# Altium PCB CM5IO.PcbDoc (part 1 of 4)
Units mm, origin at the board's own origin, x right, y up, seen from the top; angles counter-clockwise.
Board outline 160 x 90 mm, 4 copper layers (F.Cu, In1.Cu, In2.Cu, B.Cu); 76 components, 212 nets, 672 pads, 703 vias.
Unrouted connection lines stored in the file: 4.
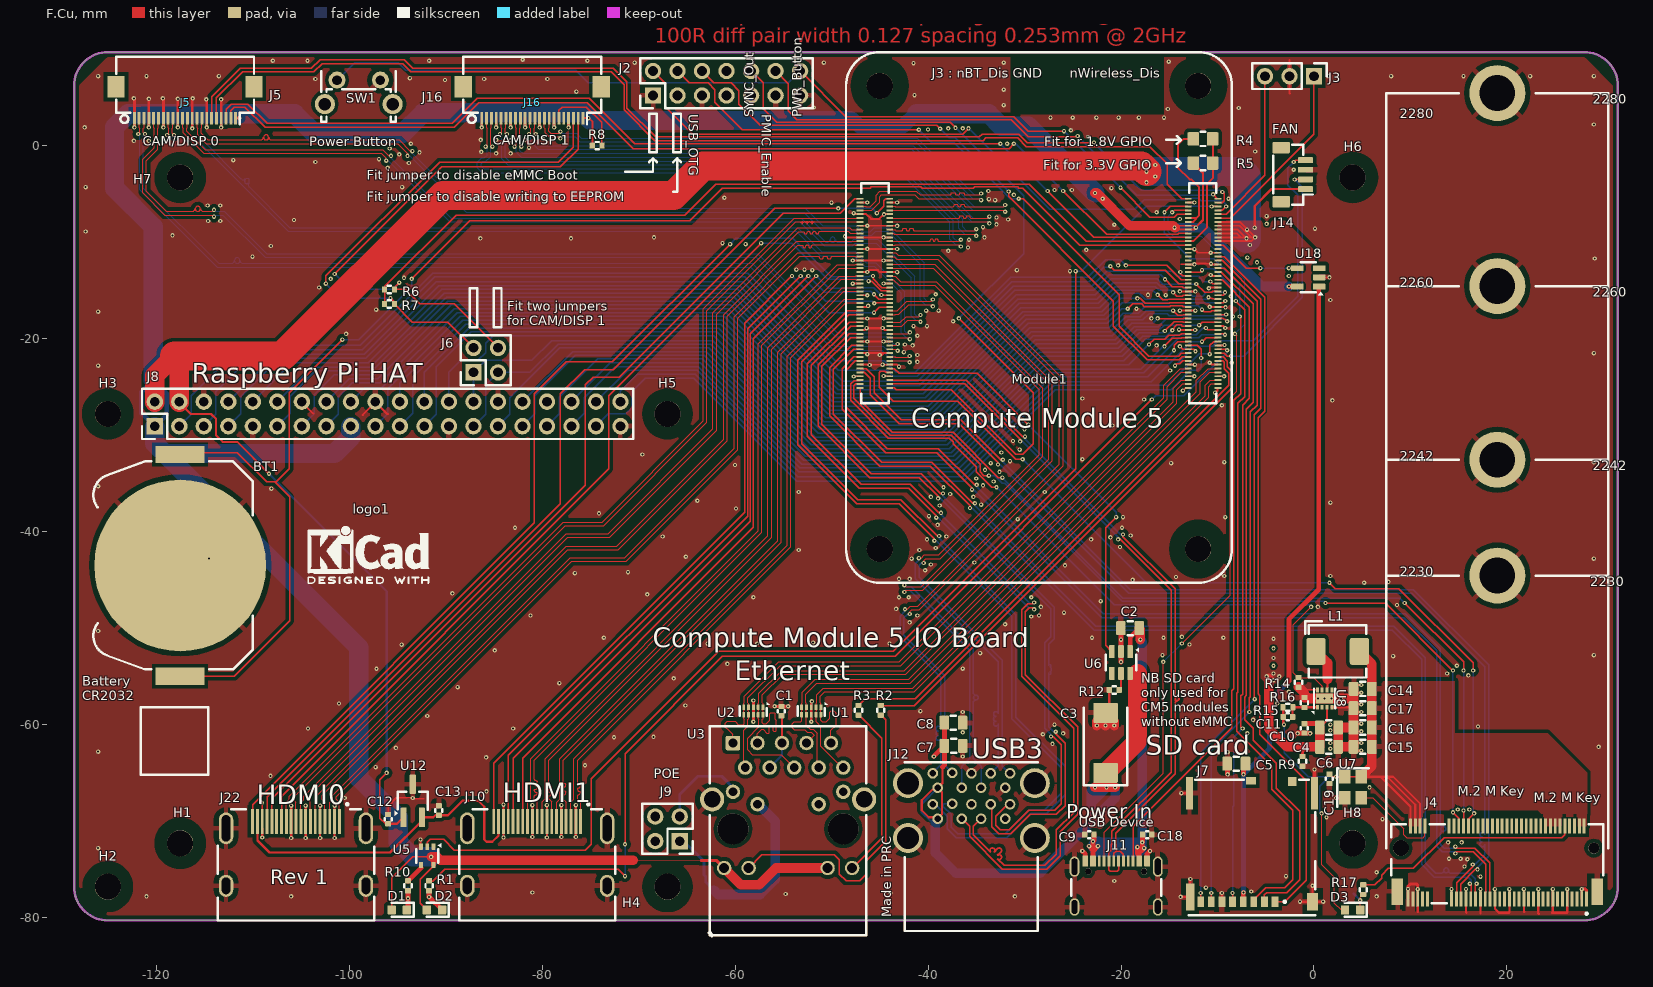
[diagram p0: F.Cu view]
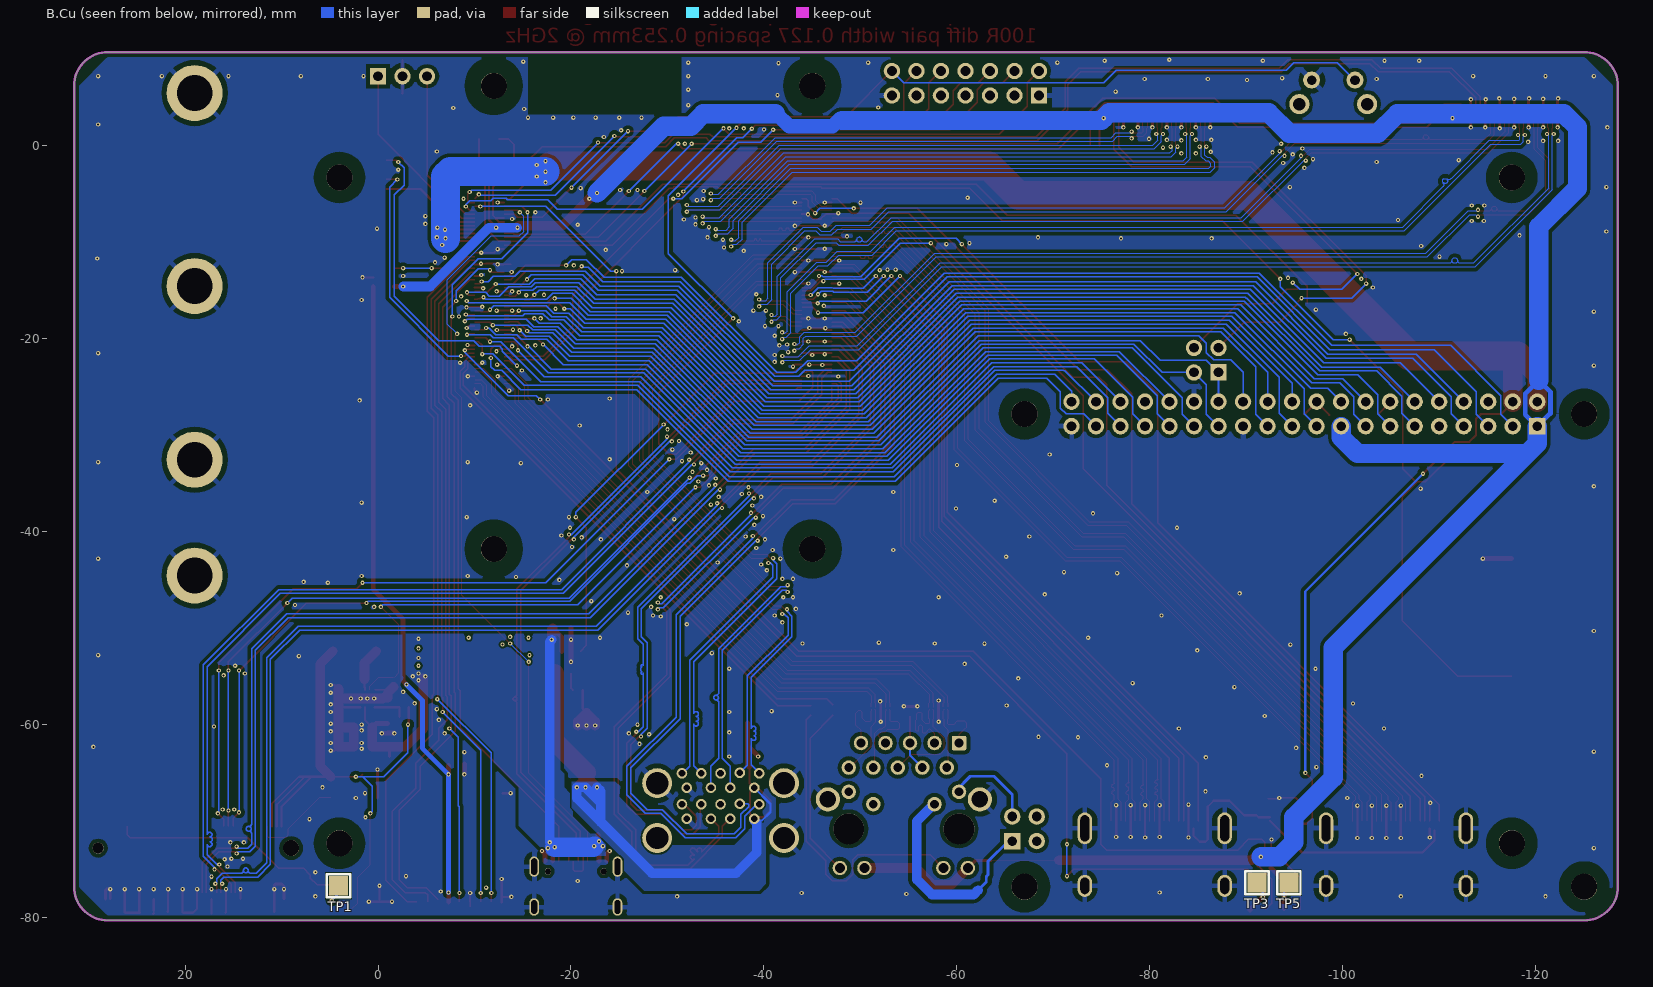
[diagram p1: B.Cu view, seen from below]
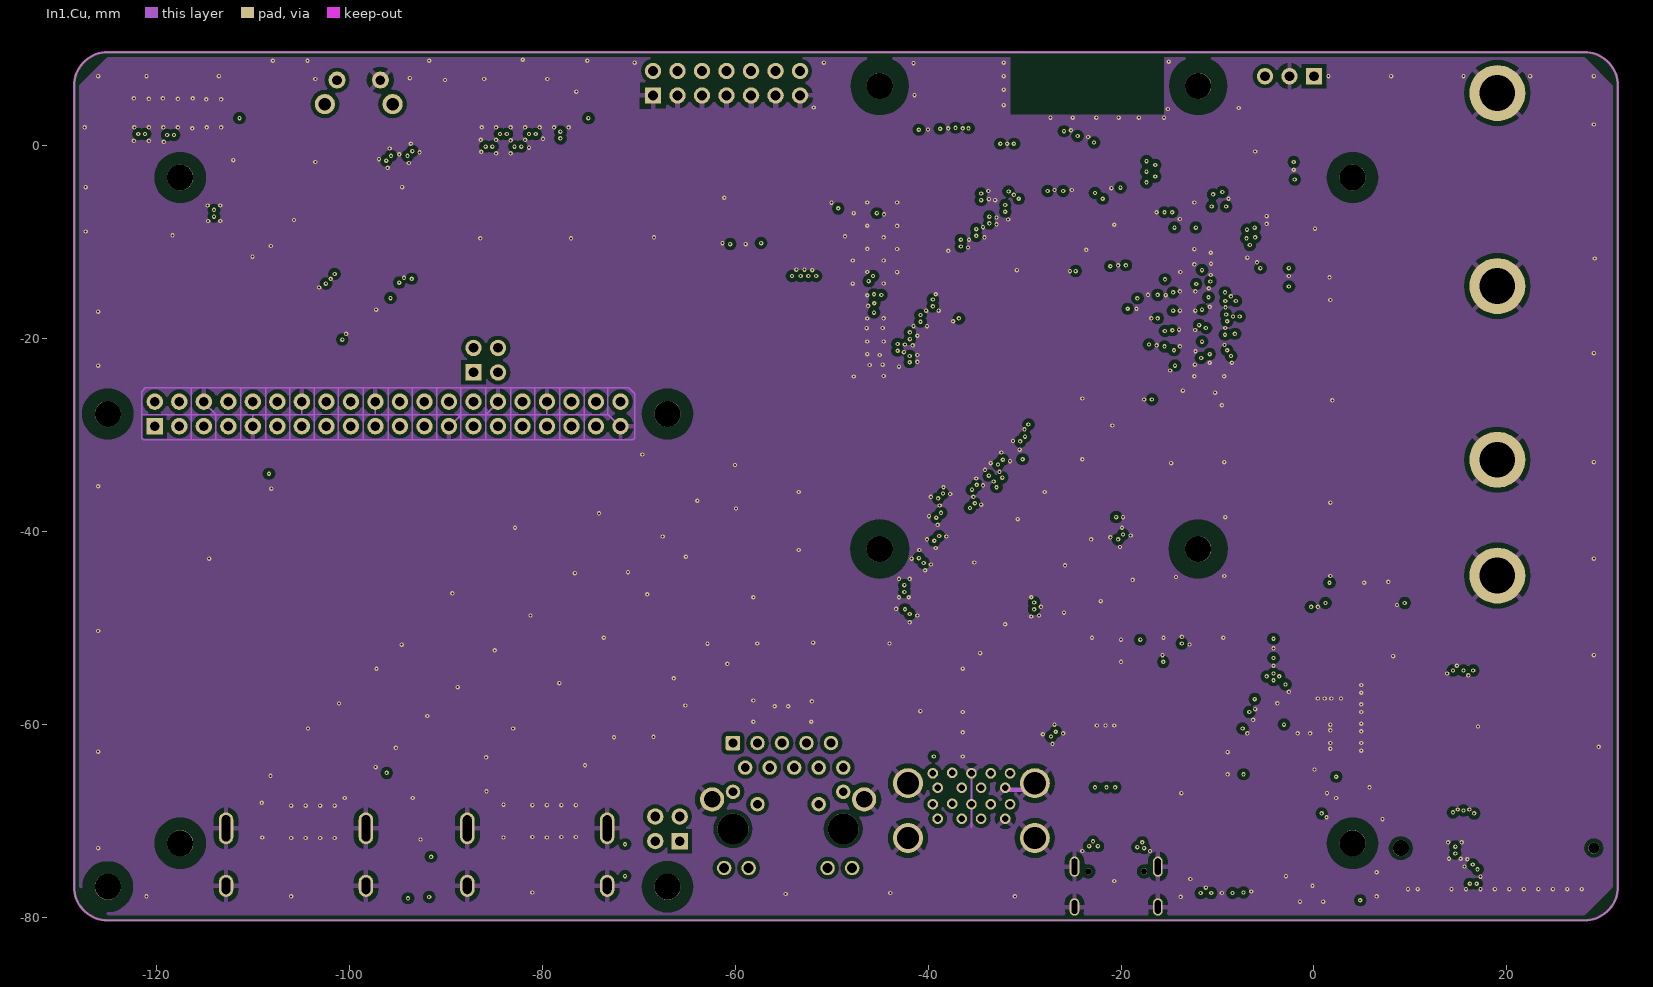
[diagram p2: In1.Cu]
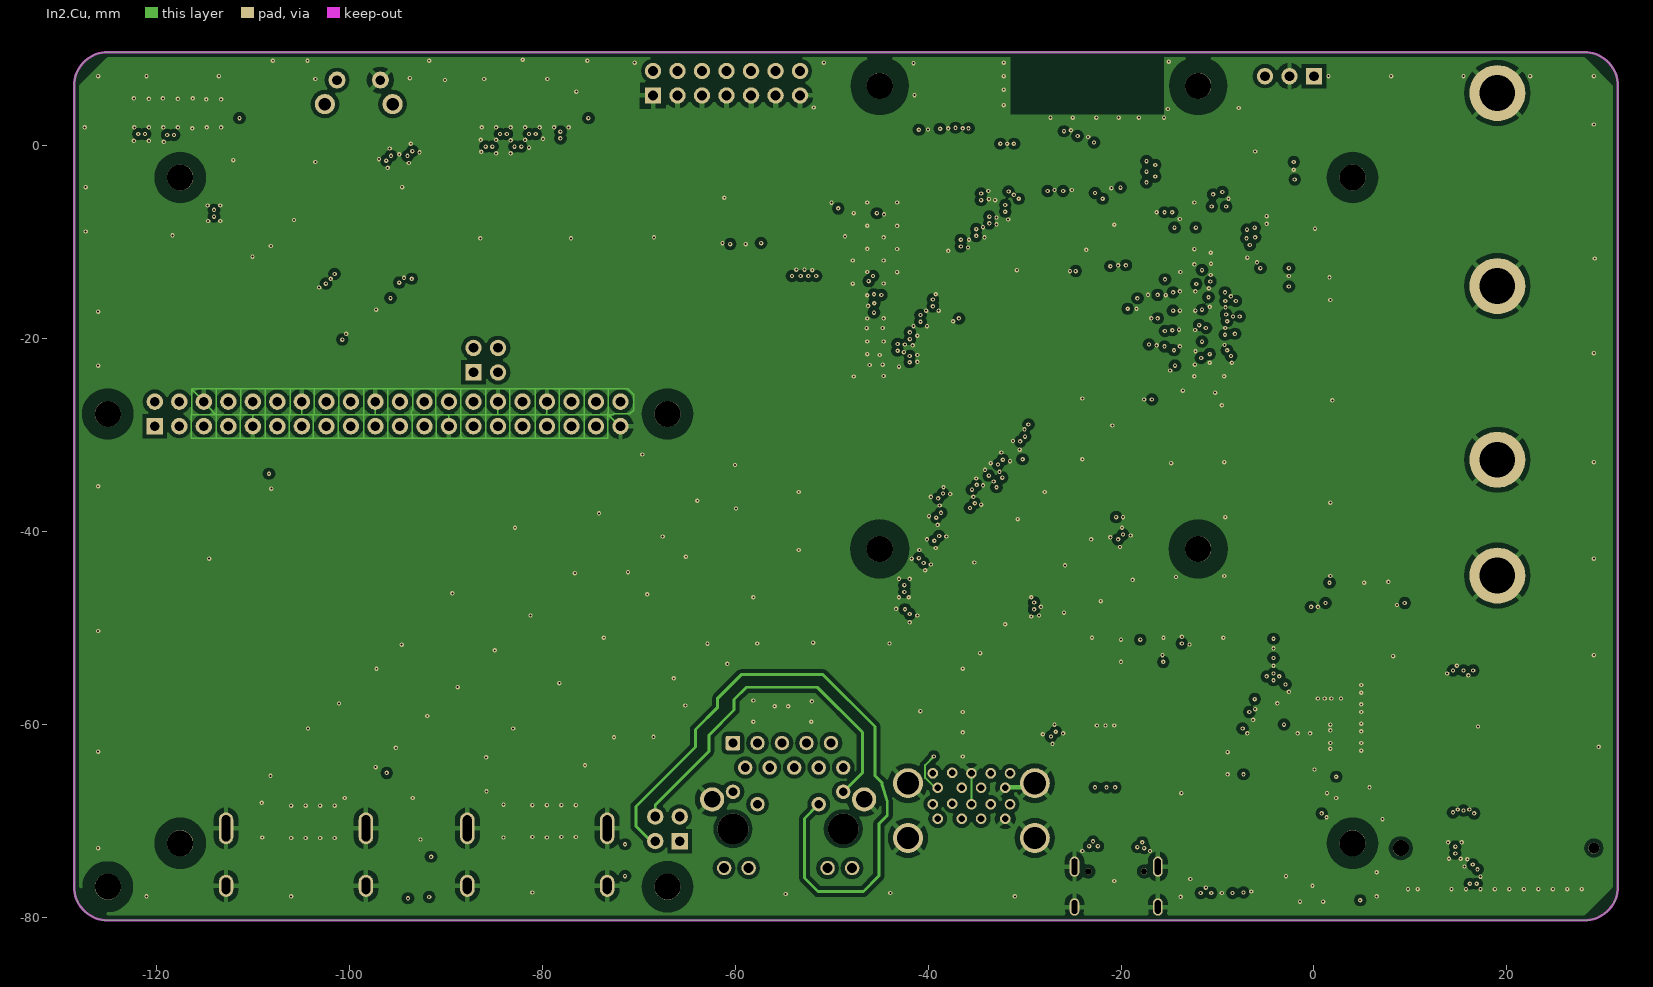
[diagram p3: In2.Cu]

## Layer stack, top to bottom
F.Mask: solder mask 0.0102, Solder Resist, Dk 3.5
F.Cu: signal copper 0.0356
Dielectric 1: dielectric 0.32, FR-4, Dk 4.8
In1.Cu: signal copper 0.0356
Dielectric2: dielectric 0.32, FR-4, Dk 4.8
In2.Cu: signal copper 0.0356
Dielectric3: dielectric 0.32, FR-4, Dk 4.8
B.Cu: signal copper 0.0356
B.Mask: solder mask 0.0102, Solder Resist, Dk 3.5

## Board outline
28,-80.3 ccw(c28,-76.8) 31.5,-76.8 31.5,6.2 ccw(c28,6.2) 28,9.7 -125,9.7 ccw(c-125,6.2) -128.5,6.2 -128.5,-76.8 ccw(c-125,-76.8) -125,-80.3 28,-80.3

## Design rules (kind name [scope] priority, off if disabled: settings)
Clearance "Clearence 1.7_PadClass" [InPadClass('Pad Class Clearance 1.7')] p1: gap=1.7 ignorepadtopadclearanceinfootprint=FALSE
Clearance "Clearence 1.3_PadClass" [InPadClass('Pad Class Clearance 1.3')] p2: gap=1.3 ignorepadtopadclearanceinfootprint=FALSE
Clearance "Clearence 0.4_Polygon" [InNamedPolygon('In1.Cu-GND') OR InNamedPolygon('In2.Cu-GND')] p3: gap=0.4 ignorepadtopadclearanceinfootprint=FALSE
Clearance "Clearence 0.39_Polygon" [InNamedPolygon('F.Cu-GND') OR InNamedPolygon('B.Cu-GND')] p4: gap=0.39 ignorepadtopadclearanceinfootprint=FALSE
Clearance "Clearence 0.2_Polygon" [InNamedPolygon('F.Cu-/PCIe-M2/M2_3v3') OR InNamedPolygon('F.Cu-/+5v') OR InNamedPolygon('F.Cu-/PCIe-M2/M2_3v3-1') OR InNamedPolygon('B.Cu-/+5v') OR InNamedPolygon('B.Cu-/CM5_HighSpeed/VBUS')] p5: gap=0.2 ignorepadtopadclearanceinfootprint=FALSE
MinimumSolderMaskSliver [All] p1: minsoldermaskwidth=0
PolygonConnect Polygon_B.Cu-/CM5_HighSpeed/VBUS_ConnectDirect [IsNamedPolygon('B.Cu-/CM5_HighSpeed/VBUS') vs IsVia] p1: connectstyle=Direct reliefconductorwidth=0.254 reliefentries=4 polygonreliefangle="90 Angle" airgapwidth=0.254
PolygonConnect Polygon_B.Cu-/CM5_HighSpeed/VBUS_ConnectRelief45 [IsNamedPolygon('B.Cu-/CM5_HighSpeed/VBUS') vs (IsThruPin or IsSMTPin) and (PadShape_AllLayers = 'Round')] p2: connectstyle=Relief reliefconductorwidth=0.5 reliefentries=4 polygonreliefangle="45 Angle" airgapwidth=0.5
PolygonConnect Polygon_B.Cu-/CM5_HighSpeed/VBUS_ConnectRelief90 [IsNamedPolygon('B.Cu-/CM5_HighSpeed/VBUS') vs (IsThruPin or IsSMTPin) and (PadShape_AllLayers <> 'Round')] p3: connectstyle=Relief reliefconductorwidth=0.5 reliefentries=4 polygonreliefangle="90 Angle" airgapwidth=0.5
PolygonConnect Polygon_B.Cu-/+5v_ConnectDirect [IsNamedPolygon('B.Cu-/+5v') vs IsVia] p4: connectstyle=Direct reliefconductorwidth=0.254 reliefentries=4 polygonreliefangle="90 Angle" airgapwidth=0.254
PolygonConnect Polygon_B.Cu-/+5v_ConnectRelief45 [IsNamedPolygon('B.Cu-/+5v') vs (IsThruPin or IsSMTPin) and (PadShape_AllLayers = 'Round')] p5: connectstyle=Relief reliefconductorwidth=0.5 reliefentries=4 polygonreliefangle="45 Angle" airgapwidth=0.5
PolygonConnect Polygon_B.Cu-/+5v_ConnectRelief90 [IsNamedPolygon('B.Cu-/+5v') vs (IsThruPin or IsSMTPin) and (PadShape_AllLayers <> 'Round')] p6: connectstyle=Relief reliefconductorwidth=0.5 reliefentries=4 polygonreliefangle="90 Angle" airgapwidth=0.5
PolygonConnect Polygon_B.Cu-GND_ConnectDirect [IsNamedPolygon('B.Cu-GND') vs IsVia] p7: connectstyle=Direct reliefconductorwidth=0.254 reliefentries=4 polygonreliefangle="90 Angle" airgapwidth=0.254
PolygonConnect Polygon_B.Cu-GND_ConnectRelief45 [IsNamedPolygon('B.Cu-GND') vs (IsThruPin or IsSMTPin) and (PadShape_AllLayers = 'Round')] p8: connectstyle=Relief reliefconductorwidth=0.508 reliefentries=4 polygonreliefangle="45 Angle" airgapwidth=0.508
PolygonConnect Polygon_B.Cu-GND_ConnectRelief90 [IsNamedPolygon('B.Cu-GND') vs (IsThruPin or IsSMTPin) and (PadShape_AllLayers <> 'Round')] p9: connectstyle=Relief reliefconductorwidth=0.508 reliefentries=4 polygonreliefangle="90 Angle" airgapwidth=0.508
PolygonConnect Polygon_In2.Cu-GND_ConnectDirect [IsNamedPolygon('In2.Cu-GND') vs IsVia] p10: connectstyle=Direct reliefconductorwidth=0.254 reliefentries=4 polygonreliefangle="90 Angle" airgapwidth=0.254
PolygonConnect Polygon_In2.Cu-GND_ConnectRelief45 [IsNamedPolygon('In2.Cu-GND') vs (IsThruPin or IsSMTPin) and (PadShape_AllLayers = 'Round')] p11: connectstyle=Relief reliefconductorwidth=0.508 reliefentries=4 polygonreliefangle="45 Angle" airgapwidth=0.508
PolygonConnect Polygon_In2.Cu-GND_ConnectRelief90 [IsNamedPolygon('In2.Cu-GND') vs (IsThruPin or IsSMTPin) and (PadShape_AllLayers <> 'Round')] p12: connectstyle=Relief reliefconductorwidth=0.508 reliefentries=4 polygonreliefangle="90 Angle" airgapwidth=0.508
PolygonConnect Polygon_In1.Cu-GND_ConnectDirect [IsNamedPolygon('In1.Cu-GND') vs IsVia] p13: connectstyle=Direct reliefconductorwidth=0.254 reliefentries=4 polygonreliefangle="90 Angle" airgapwidth=0.254
PolygonConnect Polygon_In1.Cu-GND_ConnectRelief45 [IsNamedPolygon('In1.Cu-GND') vs (IsThruPin or IsSMTPin) and (PadShape_AllLayers = 'Round')] p14: connectstyle=Relief reliefconductorwidth=0.508 reliefentries=4 polygonreliefangle="45 Angle" airgapwidth=0.508
PolygonConnect Polygon_In1.Cu-GND_ConnectRelief90 [IsNamedPolygon('In1.Cu-GND') vs (IsThruPin or IsSMTPin) and (PadShape_AllLayers <> 'Round')] p15: connectstyle=Relief reliefconductorwidth=0.508 reliefentries=4 polygonreliefangle="90 Angle" airgapwidth=0.508
PolygonConnect Polygon_F.Cu-GND_ConnectDirect [IsNamedPolygon('F.Cu-GND') vs IsVia] p16: connectstyle=Direct reliefconductorwidth=0.254 reliefentries=4 polygonreliefangle="90 Angle" airgapwidth=0.254
PolygonConnect Polygon_F.Cu-GND_ConnectRelief45 [IsNamedPolygon('F.Cu-GND') vs (IsThruPin or IsSMTPin) and (PadShape_AllLayers = 'Round')] p17: connectstyle=Relief reliefconductorwidth=0.508 reliefentries=4 polygonreliefangle="45 Angle" airgapwidth=0.508
PolygonConnect Polygon_F.Cu-GND_ConnectRelief90 [IsNamedPolygon('F.Cu-GND') vs (IsThruPin or IsSMTPin) and (PadShape_AllLayers <> 'Round')] p18: connectstyle=Relief reliefconductorwidth=0.508 reliefentries=4 polygonreliefangle="90 Angle" airgapwidth=0.508
PolygonConnect Polygon_F.Cu-/PCIe-M2/M2_3v3-1_ConnectDirect [IsNamedPolygon('F.Cu-/PCIe-M2/M2_3v3-1') vs IsVia] p19: connectstyle=Direct reliefconductorwidth=0.254 reliefentries=4 polygonreliefangle="90 Angle" airgapwidth=0.254
PolygonConnect Polygon_F.Cu-/PCIe-M2/M2_3v3-1_ConnectRelief45 [IsNamedPolygon('F.Cu-/PCIe-M2/M2_3v3-1') vs (IsThruPin or IsSMTPin) and (PadShape_AllLayers = 'Round')] p20: connectstyle=Relief reliefconductorwidth=0.5 reliefentries=4 polygonreliefangle="45 Angle" airgapwidth=0.5
PolygonConnect Polygon_F.Cu-/PCIe-M2/M2_3v3-1_ConnectRelief90 [IsNamedPolygon('F.Cu-/PCIe-M2/M2_3v3-1') vs (IsThruPin or IsSMTPin) and (PadShape_AllLayers <> 'Round')] p21: connectstyle=Relief reliefconductorwidth=0.5 reliefentries=4 polygonreliefangle="90 Angle" airgapwidth=0.5
PolygonConnect Polygon_F.Cu-/+5v_ConnectDirect [IsNamedPolygon('F.Cu-/+5v') vs IsVia] p22: connectstyle=Direct reliefconductorwidth=0.254 reliefentries=4 polygonreliefangle="90 Angle" airgapwidth=0.254
PolygonConnect Polygon_F.Cu-/+5v_ConnectRelief45 [IsNamedPolygon('F.Cu-/+5v') vs (IsThruPin or IsSMTPin) and (PadShape_AllLayers = 'Round')] p23: connectstyle=Relief reliefconductorwidth=0.5 reliefentries=4 polygonreliefangle="45 Angle" airgapwidth=0.5
PolygonConnect Polygon_F.Cu-/+5v_ConnectRelief90 [IsNamedPolygon('F.Cu-/+5v') vs (IsThruPin or IsSMTPin) and (PadShape_AllLayers <> 'Round')] p24: connectstyle=Relief reliefconductorwidth=0.5 reliefentries=4 polygonreliefangle="90 Angle" airgapwidth=0.5
PolygonConnect Polygon_F.Cu-/PCIe-M2/M2_3v3_ConnectDirect [IsNamedPolygon('F.Cu-/PCIe-M2/M2_3v3') vs IsVia] p25: connectstyle=Direct reliefconductorwidth=0.254 reliefentries=4 polygonreliefangle="90 Angle" airgapwidth=0.254
PolygonConnect Polygon_F.Cu-/PCIe-M2/M2_3v3_ConnectRelief45 [IsNamedPolygon('F.Cu-/PCIe-M2/M2_3v3') vs (IsThruPin or IsSMTPin) and (PadShape_AllLayers = 'Round')] p26: connectstyle=Relief reliefconductorwidth=0.5 reliefentries=4 polygonreliefangle="45 Angle" airgapwidth=0.5
PolygonConnect Polygon_F.Cu-/PCIe-M2/M2_3v3_ConnectRelief90 [IsNamedPolygon('F.Cu-/PCIe-M2/M2_3v3') vs (IsThruPin or IsSMTPin) and (PadShape_AllLayers <> 'Round')] p27: connectstyle=Relief reliefconductorwidth=0.5 reliefentries=4 polygonreliefangle="90 Angle" airgapwidth=0.5
RoutingVias [All] p1: holewidth=0.711 width=1.27 viastyle="Through Hole" minholewidth=0.711 minwidth=1.27 maxholewidth=0.711 maxwidth=1.27
SilkToSilkClearance [All] p1: silktosilkclearance=0
SilkToSolderMaskClearance [IsPad] p1: minsilkscreentomaskgap=0 clearancetoexposedcopper=TRUE
SolderMaskExpansion [All] p1: expansion=0.102 istentingtop=FALSE
Width [All] p1: maxlimit=10 minlimit=0.254 preferedwidth=0.254 minimp=50.000000 maximp=50.000000 favimp=50.000000
27 further rules are at their usual default settings.

## Classes and differential pairs
pad class "Pad Class Clearance 1.7": Module1-Un1 Module1-Un2 Module1-Un3 Module1-Un4
pad class "Pad Class Clearance 1.3": H1-Un1 H2-Un1 H3-Un1 H4-Un1 H5-Un1 H6-Un1 H7-Un1 H8-Un1

## Components (designator, comment, footprint, x,y, rotation, side; value= is the part's Value field where it differs from the comment)
BT1 "Comment" BatteryHolder_Keystone_3034_1x20mm -117.5,-43.5 r270 top value=Battery_Cell
C1 "Comment" C_0402_1005Metric -55.2,-58.6 r90 top value=100n
C2 "Comment" C_0805_2012Metric -19.062,-50 r180 top value=10u
C3 "Comment" CP_EIA-7343-31_Kemet-D -21.6,-61.887 r90 top value=100uF
C4 "Comment" C_0805_2012Metric 1.55,-60.3 r0 top value=10u
C5 "Comment" C_0805_2012Metric -8.05,-64.05 r180 top value=10u
C6 "Comment" C_0805_2012Metric 1.55,-62.3 r0 top value=10u
C7 "Comment" C_0805_2012Metric -37.35,-62.2 r0 top value=10u
C8 "Comment" C_0805_2012Metric -37.362,-59.8 r0 top value=10u
C9 "Comment" C_0402_1005Metric -23.28,-71.4 r180 top value=100n
C10 "Comment" C_0402_1005Metric -1,-60.385 r270 top value=100n
C11 "Comment" C_0402_1005Metric -2.7,-59.2 r0 top value=4.7nF
C12 "Comment" C_0402_1005Metric -95.95,-69.8 r90 top value=100n
C13 "Comment" C_0402_1005Metric -90.7,-68.9 r90 top value=100n
C14 "Comment" C_0805_2012Metric 5.05,-56.3 r180 top value=10u
C15 "Comment" C_0805_2012Metric 5.05,-62.3 r180 top value=10u
C16 "Comment" C_0805_2012Metric 5.05,-60.3 r180 top value=10u
C17 "Comment" C_0805_2012Metric 5.038,-58.3 r180 top value=10u
C18 "Comment" C_0402_1005Metric -17.28,-71.4 r0 top value=100n
C19 "Comment" C_0402_1005Metric 1.6,-65.62 r270 top value=100n
D1 "Comment" LED_0603_1608Metric -94.8,-79.2 r180 top value="LED Red"
D2 "Comment" LED_0603_1608Metric -91.15,-79.2 r180 top value="LED Green"
D3 "Comment" LED_0603_1608Metric 4,-79.2 r180 top value="LED Green"
H1 "Comment" MountingHole_2.7mm_M2.5_DIN965 -117.5,-72.3 r0 top value=MountingHole
H2 "Comment" MountingHole_2.7mm_M2.5_DIN965 -125,-76.8 r0 top value=MountingHole
H3 "Comment" MountingHole_2.7mm_M2.5_DIN965 -125,-27.8 r0 top value=MountingHole
H4 "Comment" MountingHole_2.7mm_M2.5_DIN965 -67,-76.8 r0 top value=MountingHole
H5 "Comment" MountingHole_2.7mm_M2.5_DIN965 -67,-27.8 r0 top value=MountingHole
H6 "Comment" MountingHole_2.7mm_M2.5_DIN965 4,-3.3 r0 top value=MountingHole
H7 "Comment" MountingHole_2.7mm_M2.5_DIN965 -117.5,-3.3 r0 top value=MountingHole
H8 "Comment" MountingHole_2.7mm_M2.5_DIN965 4,-72.3 r0 top value=MountingHole
J2 "Comment" PinHeader_2x07_P2.54mm_Vertical -68.5,5.2 r90 top value=Conn_02x07_Odd_Even
J3 "Comment" PinHeader_1x03_P2.54mm_Vertical 0,7.2 r270 top value=Conn_01x03
J4 "Comment" "M.2 M Key socket" 19,-72.8 r180 top value=Bus_M.2_Socket_M
J5 "Comment" Hirose_FH12-22S-0.5SH_1x22-1MP_P0.50mm_Horizontal -117,4.7 r180 top value=Conn_01x22_Female
J6 "Comment" PinHeader_2x02_P2.54mm_Vertical -87.1,-23.5 r90 top value=THD-02-R
J7 "Comment" SDCARD_MOLEX_503398-1892 -6.42,-72.75 r180 top value=Micro_SD_Card_Det
J8 "Comment" PinHeader_2x20_P2.54mm_Vertical -120.13,-29.07 r90 top value=THD-20-R
J9 "Comment" PinHeader_2x02_P2.54mm_Vertical -65.73,-72.07 r180 top value=THD-02-R
J10 "Comment" "EDAC 690-019-298-412" -80.5,-70.75 r0 top value=690-019-298-412
J11 "Comment" USB_C_Receptacle_GCT_USB4105-xx-A_16P_TopMnt_Horizontal -20.5,-77.825 r0 top value=USB_C_Receptacle_USB2.0
J12 "Comment" MTCONN_UBAF30-D2011 -35.5,-71.75 r0 top value=USB3_A
J14 "Comment" JST_SH_BM04B-SRSS-TB_1x04-1MP_P1.00mm_Vertical -2.2,-3 r90 top value=JST_SHBM04B-SRSS-TB
J16 "Comment" Hirose_FH12-22S-0.5SH_1x22-1MP_P0.50mm_Horizontal -81,4.7 r180 top value=Conn_01x22_Female
J22 "Comment" "EDAC 690-019-298-412" -105.5,-70.75 r0 top value=690-019-298-412
L1 "Comment" L_Bourns_SRP5030CC 2.45,-52.4 r0 top value=2.2uH
logo1 "Comment" KiCad-Logo2_5mm_SilkScreen -98,-42.4 r0 top value=KiCad-Logo2_5mm_SilkScreen
Module1 "Comment" Raspberry-Pi-5-Compute-Module -12,6.2 r180 top value=ComputeModule5-CM5
R1 "Comment" R_0402_1005Metric -91.7,-76.7 r90 top value=1k
R2 "Comment" R_0402_1005Metric -44.9,-58.515 r90 top value=470R
R3 "Comment" R_0402_1005Metric -47.2,-58.515 r90 top value=470R
R4 "Comment" R_0805_2012Metric_Pad1.20x1.40mm_HandSolder -11.5,0.7 r0 top value=nf
R5 "Comment" R_0805_2012Metric_Pad1.20x1.40mm_HandSolder -11.5,-1.8 r0 top value=0R
R6 "Comment" R_0402_1005Metric -95.815,-14.9 r0 top value="2.2K 1%"
R7 "Comment" R_0402_1005Metric -95.815,-16.4 r0 top value="2.2K 1%"
R8 "Comment" R_0402_1005Metric -74.285,0 r0 top value="2.2K 1%"
R9 "Comment" R_0402_1005Metric -1.2,-63.8 r270 top value="2.2K 1%"
R10 "Comment" R_0402_1005Metric -93.9,-76.7 r90 top value=1k
R12 "Comment" R_0402_1005Metric -20.7,-56.4 r180 top value="15K 1%"
R14 "Comment" R_0402_1005Metric -1.6,-55.615 r270 top value="100K 1%"
R15 "Comment" R_0402_1005Metric -2.7,-58.2 r0 top value="10K 1%"
R16 "Comment" R_0402_1005Metric -1,-57.715 r90 top value="2.2K 1%"
R17 "Comment" R_0402_1005Metric 5.1,-77.1 r90 top value=1k
SW1 "Comment" SW_Tactile_SPST_Angled_PTS645Vx58-2LFS -101.25,6.8 r0 top value="Right angle Tact button"
TP1 "Comment" TestPoint_Pad_2.0x2.0mm 4.1,-76.7 r180 bottom value=TestPoint
TP3 "Comment" TestPoint_Pad_2.0x2.0mm -91.088,-76.4 r180 bottom value=TestPoint
TP5 "Comment" TestPoint_Pad_2.0x2.0mm -94.4,-76.4 r180 bottom value=TestPoint
U1 "Comment" USON-10_2.5x1.0mm_P0.5mm -52.1,-58.585 r270 top value=TPD4EUSB30
U2 "Comment" USON-10_2.5x1.0mm_P0.5mm -58.1,-58.585 r270 top value=TPD4EUSB30
U3 "Comment" TRJG0926HENL -54.5,-70.8 r0 top value=MagJack-A70-112-331N126
U5 "Comment" SOT-353_SC-70-5 -91.9,-73.6 r270 top value=74LVC1G07SE-7
U6 "Comment" SOT-23-6 -20,-53.562 r270 top value=AP22653W6
U7 "Comment" Crystal_SMD_3225-4Pin_3.2x2.5mm 4.05,-66.5 r270 top value=ASEK-32.768KHZ-L-R-T
U8 "Comment" DFN-8-1EP_2x2mm_P0.5mm_EP1.05x1.75mm 1.1,-57.3 r90 top value=AP3441SHE-7B
U12 "Comment" TSOT-23_HandSoldering -93.4,-67.9 r90 top value=RT9742SNGV
U18 "Comment" SOT-23-5 -0.6,-13.65 r180 top value=RT9742GGJ5

## Footprints (in the part's own frame and the unit in brackets; to place one, negate y for a bottom-side part, rotate by r counter-clockwise, add the part's x,y. Pads: shape width x height; smd on the part's side, far side on the other; paste and mask are expansions set on the pad)
BatteryHolder_Keystone_3034_1x20mm [mm]
  rect 1.77x5.08 smd mask+0: 1(-11.485,0) 1(11.485,0)
  round 17.8 smd paste-17.8 mask+0: 2(0,0)
  silkscreen extent -10.78,-9 10.78,7.54
C_0402_1005Metric [mm]
  rrect25% 0.56x0.62 smd mask+0: 1(-0.48,0) 2(0.48,0)
  silkscreen extent -0.11,-0.36 0.11,0.36
C_0805_2012Metric [mm]
  rrect25% 1x1.45 smd mask+0: 1(-0.95,0) 2(0.95,0)
  silkscreen extent -0.26,-0.73 0.26,0.73
CP_EIA-7343-31_Kemet-D [mm]
  rrect12% 2.075x2.55 smd mask+0: 1(-3.113,0) 2(3.113,0)
  silkscreen extent -4.41,-2.26 3.65,2.26
Crystal_SMD_3225-4Pin_3.2x2.5mm [mm]
  rect 1.4x1.2 smd mask+0: 1(-1.1,-0.85) 2(1.1,-0.85) 3(1.1,0.85) 4(-1.1,0.85)
  silkscreen extent -2,-1.65 2,1.65
DFN-8-1EP_2x2mm_P0.5mm_EP1.05x1.75mm [mm]
  rect 0.5x0.3 smd mask+0: 1(-0.9,0.75) 2(-0.9,0.25) 3(-0.9,-0.25) 4(-0.9,-0.75) 5(0.9,-0.75) 6(0.9,-0.25) 7(0.9,0.25) 8(0.9,0.75)
  rect 1.05x1.75 smd paste-1.75 mask+0: 9(0,0)
  rect 0.85x0.65 on Top Paste mask-0.85: Un1(0,0.437) Un2(0,-0.437)
  silkscreen extent -1.62,-1.1 1,1.37
"EDAC 690-019-298-412" [mm]
  rect 0.3x2.6 smd mask+0: 1(4.5,0.73) 2(4,0.73) 3(3.5,0.73) 4(3,0.73) 5(2.5,0.73) 6(2,0.73) 7(1.5,0.73) 8(1,0.73) 9(0.5,0.73) 10(0,0.73) 11(-0.5,0.73) 12(-1,0.73) 13(-1.5,0.73) 14(-2,0.73) 15(-2.5,0.73) 16(-3,0.73) 17(-3.5,0.73) 18(-4,0.73) 19(-4.5,0.73)
  rrect100% 1.5x3.3 hole 2.7 slot 0.9 at 0 deg paste-2539.97 mask+0: SH1(7.25,0) SH2(-7.25,0)
  rrect100% 1.5x2.3 hole 1.7 slot 0.9 at 0 deg paste-2539.97 mask+0: SH3(-7.25,-5.96) SH4(7.25,-5.96)
  silkscreen extent -8.1,-9.55 8.1,2.6
Hirose_FH12-22S-0.5SH_1x22-1MP_P0.50mm_Horizontal [mm]
  rect 0.3x1.3 smd mask+0: 1(5.25,1.85) 2(4.75,1.85) 3(4.25,1.85) 4(3.75,1.85) 5(3.25,1.85) 6(2.75,1.85) 7(2.25,1.85) 8(1.75,1.85) 9(1.25,1.85) 10(0.75,1.85) 11(0.25,1.85) 12(-0.25,1.85) 13(-0.75,1.85) 14(-1.25,1.85) 15(-1.75,1.85) 16(-2.25,1.85) 17(-2.75,1.85) 18(-3.25,1.85) 19(-3.75,1.85) 20(-4.25,1.85) 21(-4.75,1.85) 22(-5.25,1.85)
  rect 1.8x2.2 smd mask+0: MP(-7.15,-1.4) MP(7.15,-1.4)
  silkscreen extent -7.15,-4.5 7.15,2.5
JST_SH_BM04B-SRSS-TB_1x04-1MP_P1.00mm_Vertical [mm]
  rrect25% 0.6x1.55 smd mask+0: 1(-1.5,-1.325) 2(-0.5,-1.325) 3(0.5,-1.325) 4(1.5,-1.325)
  rrect21% 1.2x1.8 smd mask+0: MP(-2.8,1.2) MP(2.8,1.2)
  silkscreen extent -3.11,-2.1 3.11,2.01
KiCad-Logo2_5mm_SilkScreen [mm]
  silkscreen extent -6.28,-3 6.29,2.98
L_Bourns_SRP5030CC [mm]
  rrect25% 2x2.8 smd mask+0: 1(-2.25,0) 2(2.25,0)
  silkscreen extent -3.35,-2.72 2.97,3.1
LED_0603_1608Metric [mm]
  rrect25% 0.875x0.95 smd mask+0: 1(-0.787,0) 2(0.787,0)
  silkscreen extent -1.49,-0.73 0.8,0.73
"M.2 M Key socket" [mm]
  rect 0.3x1.55 smd mask+0.102: 1(-9.25,5.275) 2(-9,-2.275) 3(-8.75,5.275) 4(-8.5,-2.275) 5(-8.25,5.275) 6(-8,-2.275) 7(-7.75,5.275) 8(-7.5,-2.275) 9(-7.25,5.275) 10(-7,-2.275) 11(-6.75,5.275) 12(-6.5,-2.275) 13(-6.25,5.275) 14(-6,-2.275) 15(-5.75,5.275) 16(-5.5,-2.275) 17(-5.25,5.275) 18(-5,-2.275) 19(-4.75,5.275) 20(-4.5,-2.275) 21(-4.25,5.275) 22(-4,-2.275) 23(-3.75,5.275) 24(-3.5,-2.275) 25(-3.25,5.275) 26(-3,-2.275) 27(-2.75,5.275) 28(-2.5,-2.275) 29(-2.25,5.275) 30(-2,-2.275) 31(-1.75,5.275) 32(-1.5,-2.275) 33(-1.25,5.275) 34(-1,-2.275) 35(-0.75,5.275) 36(-0.5,-2.275) 37(-0.25,5.275) 38(0,-2.275) 39(0.25,5.275) 40(0.5,-2.275) 41(0.75,5.275) 42(1,-2.275) 43(1.25,5.275) 44(1.5,-2.275) 45(1.75,5.275) 46(2,-2.275) 47(2.25,5.275) 48(2.5,-2.275) 49(2.75,5.275) 50(3,-2.275) 51(3.25,5.275) 52(3.5,-2.275) 53(3.75,5.275) 54(4,-2.275) 55(4.25,5.275) 56(4.5,-2.275) 57(4.75,5.275) 58(5,-2.275) 67(7.25,5.275) 68(7.5,-2.275) 69(7.75,5.275) 70(8,-2.275) 71(8.25,5.275) 72(8.5,-2.275) 73(8.75,5.275) 74(9,-2.275) 75(9.25,5.275)
  round 5.8 hole 3.7 paste-2539.97 mask+0.2: M1(0,-28.25) M2(0,-40.25) M3(0,-58.25) M4(0,-78.25)
  rect 1.2x2.75 smd mask+0.102: S1(-10.35,4.5) S2(10.35,4.5)
  round 1.15 hole 1.15 paste-2539.97 mask+0: Un1(-10,0)
  round 1.65 hole 1.65 paste-2539.97 mask+0: Un2(10,0)
  silkscreen extent -11.5,-78.25 11.5,6.9
MountingHole_2.7mm_M2.5_DIN965 [mm]
  round 2.7 hole 2.7 paste-2539.97 mask+1.3: Un1(0,0)
MTCONN_UBAF30-D2011 [mm]
  round 3.1 hole 2.3 paste-2539.97 mask+0: 10(-6.57,0) 10(-6.57,5.68) 10(6.57,0) 10(6.57,5.68)
  round 1.1 hole 0.7 paste-2539.97 mask+0: A1(-3.5,2) A2(-1,2) A3(1,2) A4(3.5,2) A5(4,3.5) A6(2,3.5) A7(0,3.5) A8(-2,3.55) A9(-4,3.5) B1(-3.5,5.2) B2(-1,5.2) B3(1,5.2) B4(3.5,5.2) B5(4,6.7) B6(2,6.7) B7(0,6.7) B8(-2,6.75) B9(-4,6.7)
  silkscreen extent -6.89,-9.64 6.89,7.86
PinHeader_1x03_P2.54mm_Vertical [mm]
  rect 1.7x1.7 hole 1 paste-2539.97 mask+0: 1(0,0)
  rrect100% 1.7x1.7 hole 1 paste-2539.97 mask+0: 2(0,-2.54) 3(0,-5.08)
  silkscreen extent -1.33,-6.41 1.33,1.33
PinHeader_2x02_P2.54mm_Vertical [mm]
  rect 1.7x1.7 hole 1 paste-2539.97 mask+0: 1(0,0)
  rrect100% 1.7x1.7 hole 1 paste-2539.97 mask+0: 2(2.54,0) 3(0,-2.54) 4(2.54,-2.54)
  silkscreen extent -1.33,-3.87 3.87,1.33
PinHeader_2x07_P2.54mm_Vertical [mm]
  rect 1.7x1.7 hole 1 paste-2539.97 mask+0: 1(0,0)
  rrect100% 1.7x1.7 hole 1 paste-2539.97 mask+0: 2(2.54,0) 3(0,-2.54) 4(2.54,-2.54) 5(0,-5.08) 6(2.54,-5.08) 7(0,-7.62) 8(2.54,-7.62) 9(0,-10.16) 10(2.54,-10.16) 11(0,-12.7) 12(2.54,-12.7) 13(0,-15.24) 14(2.54,-15.24)
  silkscreen extent -1.33,-16.57 3.87,1.33
PinHeader_2x20_P2.54mm_Vertical [mm]
  rect 1.7x1.7 hole 1 paste-2539.97 mask+0: 1(0,0)
  rrect100% 1.7x1.7 hole 1 paste-2539.97 mask+0: 2(2.54,0) 3(0,-2.54) 4(2.54,-2.54) 5(0,-5.08) 6(2.54,-5.08) 7(0,-7.62) 8(2.54,-7.62) 9(0,-10.16) 10(2.54,-10.16) 11(0,-12.7) 12(2.54,-12.7) 13(0,-15.24) 14(2.54,-15.24) 15(0,-17.78) 16(2.54,-17.78) 17(0,-20.32) 18(2.54,-20.32) 19(0,-22.86) 20(2.54,-22.86) 21(0,-25.4) 22(2.54,-25.4) 23(0,-27.94) 24(2.54,-27.94) 25(0,-30.48) 26(2.54,-30.48) 27(0,-33.02) 28(2.54,-33.02) 29(0,-35.56) 30(2.54,-35.56) 31(0,-38.1) 32(2.54,-38.1) 33(0,-40.64) 34(2.54,-40.64) 35(0,-43.18) 36(2.54,-43.18) 37(0,-45.72) 38(2.54,-45.72) 39(0,-48.26) 40(2.54,-48.26)
  silkscreen extent -1.33,-49.59 3.87,1.33
R_0402_1005Metric [mm]
  rrect25% 0.54x0.64 smd mask+0: 1(-0.51,0) 2(0.51,0)
  silkscreen extent -0.15,-0.38 0.15,0.38
R_0805_2012Metric_Pad1.20x1.40mm_HandSolder [mm]
  rrect21% 1.2x1.4 smd mask+0: 1(-1,0) 2(1,0)
  silkscreen extent -0.23,-0.73 0.23,0.73
Raspberry-Pi-5-Compute-Module [mm]
  rect 0.7x0.2 smd mask+0: 1(-2.04,31.3) 2(1.04,31.3) 3(-2.04,30.9) 4(1.04,30.9) 5(-2.04,30.5) 6(1.04,30.5) 7(-2.04,30.1) 8(1.04,30.1) 9(-2.04,29.7) 10(1.04,29.7) 11(-2.04,29.3) 12(1.04,29.3) 13(-2.04,28.9) 14(1.04,28.9) 15(-2.04,28.5) 16(1.04,28.5) 17(-2.04,28.1) 18(1.04,28.1) 19(-2.04,27.7) 20(1.04,27.7) 21(-2.04,27.3) 22(1.04,27.3) 23(-2.04,26.9) 24(1.04,26.9) 25(-2.04,26.5) 26(1.04,26.5) 27(-2.04,26.1) 28(1.04,26.1) 29(-2.04,25.7) 30(1.04,25.7) 31(-2.04,25.3) 32(1.04,25.3) 33(-2.04,24.9) 34(1.04,24.9) 35(-2.04,24.5) 36(1.04,24.5) 37(-2.04,24.1) 38(1.04,24.1) 39(-2.04,23.7) 40(1.04,23.7) 41(-2.04,23.3) 42(1.04,23.3) 43(-2.04,22.9) 44(1.04,22.9) 45(-2.04,22.5) 46(1.04,22.5) 47(-2.04,22.1) 48(1.04,22.1) 49(-2.04,21.7) 50(1.04,21.7) 51(-2.04,21.3) 52(1.04,21.3) 53(-2.04,20.9) 54(1.04,20.9) 55(-2.04,20.5) 56(1.04,20.5) 57(-2.04,20.1) 58(1.04,20.1) 59(-2.04,19.7) 60(1.04,19.7) 61(-2.04,19.3) 62(1.04,19.3) 63(-2.04,18.9) 64(1.04,18.9) 65(-2.04,18.5) 66(1.04,18.5) 67(-2.04,18.1) 68(1.04,18.1) 69(-2.04,17.7) 70(1.04,17.7) 71(-2.04,17.3) 72(1.04,17.3) 73(-2.04,16.9) 74(1.04,16.9) 75(-2.04,16.5) 76(1.04,16.5) 77(-2.04,16.1) 78(1.04,16.1) 79(-2.04,15.7) 80(1.04,15.7) 81(-2.04,15.3) 82(1.04,15.3) 83(-2.04,14.9) 84(1.04,14.9) 85(-2.04,14.5) 86(1.04,14.5) 87(-2.04,14.1) 88(1.04,14.1) 89(-2.04,13.7) 90(1.04,13.7) 91(-2.04,13.3) 92(1.04,13.3) 93(-2.04,12.9) 94(1.04,12.9) 95(-2.04,12.5) 96(1.04,12.5) 97(-2.04,12.1) 98(1.04,12.1) 99(-2.04,11.7) 100(1.04,11.7) 101(31.96,31.3) 102(35.04,31.3) 103(31.96,30.9) 104(35.04,30.9) 105(31.96,30.5) 106(35.04,30.5) 107(31.96,30.1) 108(35.04,30.1) 109(31.96,29.7) 110(35.04,29.7) 111(31.96,29.3) 112(35.04,29.3) 113(31.96,28.9) 114(35.04,28.9) 115(31.96,28.5) 116(35.04,28.5) 117(31.96,28.1) 118(35.04,28.1) 119(31.96,27.7) 120(35.04,27.7) 121(31.96,27.3) 122(35.04,27.3) 123(31.96,26.9) 124(35.04,26.9) 125(31.96,26.5) 126(35.04,26.5) 127(31.96,26.1) 128(35.04,26.1) 129(31.96,25.7) 130(35.04,25.7) 131(31.96,25.3) 132(35.04,25.3) 133(31.96,24.9) 134(35.04,24.9) 135(31.96,24.5) 136(35.04,24.5) 137(31.96,24.1) 138(35.04,24.1) 139(31.96,23.7) 140(35.04,23.7) 141(31.96,23.3) 142(35.04,23.3) 143(31.96,22.9) 144(35.04,22.9) 145(31.96,22.5) 146(35.04,22.5) 147(31.96,22.1) 148(35.04,22.1) 149(31.96,21.7) 150(35.04,21.7) 151(31.96,21.3) 152(35.04,21.3) 153(31.96,20.9) 154(35.04,20.9) 155(31.96,20.5) 156(35.04,20.5) 157(31.96,20.1) 158(35.04,20.1) 159(31.96,19.7) 160(35.04,19.7) 161(31.96,19.3) 162(35.04,19.3) 163(31.96,18.9) 164(35.04,18.9) 165(31.96,18.5) 166(35.04,18.5) 167(31.96,18.1) 168(35.04,18.1) 169(31.96,17.7) 170(35.04,17.7) 171(31.96,17.3) 172(35.04,17.3) 173(31.96,16.9) 174(35.04,16.9) 175(31.96,16.5) 176(35.04,16.5) 177(31.96,16.1) 178(35.04,16.1) 179(31.96,15.7) 180(35.04,15.7) 181(31.96,15.3) 182(35.04,15.3) 183(31.96,14.9) 184(35.04,14.9) 185(31.96,14.5) 186(35.04,14.5) 187(31.96,14.1) 188(35.04,14.1) 189(31.96,13.7) 190(35.04,13.7) 191(31.96,13.3) 192(35.04,13.3) 193(31.96,12.9) 194(35.04,12.9) 195(31.96,12.5) 196(35.04,12.5) 197(31.96,12.1) 198(35.04,12.1) 199(31.96,11.7) 200(35.04,11.7)
  round 2.7 hole 2.7 paste-2539.97 mask+1.7: Un1(0,48) Un2(0,0) Un3(33,48) Un4(33,0)
  silkscreen extent -3.5,-3.5 36.5,51.5
SDCARD_MOLEX_503398-1892 [mm]
  rect 0.7x1.1 smd mask+0: 1(-2.38,5.625) 2(-1.28,5.625) 3(-0.18,5.625) 4(0.92,5.625) 5(2.02,5.625) 6(3.12,5.625) 7(4.22,5.625) 8(5.32,5.625)
  rect 0.9x0.93 smd mask+0: 9(-4.17,-6.84)
  rect 1.05x0.78 smd mask+0: 10(0.095,-6.915)
  rect 0.7x3.33 smd mask+0: 11(-6.48,-5.64) 11(6.48,-5.64)
  rect 1.14x1.83 smd mask+0: 11(-6.26,5.61)
  rect 0.86x2.8 smd mask+0: 11(6.4,5.125)
  silkscreen extent -6.55,-7.02 6.55,7.02
SOT-23-5 [mm]
  rrect25% 1.325x0.6 smd mask+0: 1(-1.138,0.95) 2(-1.138,0) 3(-1.138,-0.95) 4(1.138,-0.95) 5(1.138,0.95)
  silkscreen extent -1.54,-1.56 0.8,1.84
SOT-23-6 [mm]
  rrect25% 1.325x0.6 smd mask+0: 1(-1.138,0.95) 2(-1.138,0) 3(-1.138,-0.95) 4(1.138,-0.95) 5(1.138,0) 6(1.138,0.95)
  silkscreen extent -1.54,-1.56 0.8,1.84
SOT-353_SC-70-5 [mm]
  rrect25% 0.65x0.4 smd mask+0: 1(-0.95,0.65) 2(-0.95,0) 3(-0.95,-0.65) 4(0.95,-0.65) 5(0.95,0.65)
  silkscreen extent -1.32,-1.16 0.7,1.44
SW_Tactile_SPST_Angled_PTS645Vx58-2LFS [mm]
  round 1.75 hole 0.99 paste-2539.97 mask+0: 1(0,0) 2(4.5,0)
  round 2.1 hole 1.3 paste-2539.97 mask+0: Un1(-1.25,-2.49) Un2(5.76,-2.49)
  silkscreen extent -1.61,-4.31 6.11,0.9
TestPoint_Pad_2.0x2.0mm [mm]
  rect 2x2 smd paste-2 mask+0: 1(0,0)
  silkscreen extent -1.2,-1.2 1.2,1.2
TRJG0926HENL [mm]
  rrect17% 1.5x1.5 hole 0.9 paste-2539.97 mask+0: 1(-5.715,8.89)
  round 1.5 hole 0.9 paste-2539.97 mask+0: 2(-4.445,6.35) 3(-3.175,8.89) 4(-1.905,6.35) 5(-0.635,8.89) 6(0.635,6.35) 7(1.905,8.89) 8(3.175,6.35) 9(4.445,8.89) 10(5.715,6.35) 11(-5.715,3.83) 12(-3.175,2.56) 13(3.175,2.56) 14(5.715,3.83)
  round 1.5 hole 1.02 paste-2539.97 mask+0: 15(-6.63,-4.06) 16(-4.09,-4.06) 17(4.09,-4.06) 18(6.63,-4.06)
  round 2.5 hole 1.7 paste-2539.97 mask+0: 19(-7.875,3.05) 20(7.875,3.05)
  round 3.2 hole 3.2 paste-2539.97 mask+0: Un1(-5.715,0) Un2(5.715,0)
  silkscreen extent -8.25,-11.15 8.12,10.62
TSOT-23_HandSoldering [mm]
  rrect25% 2x0.65 smd mask+0: 1(-1.71,0.95) 2(-1.71,-0.95) 3(1.71,0)
  silkscreen extent -1.52,-1.56 0.96,1.88
USB_C_Receptacle_GCT_USB4105-xx-A_16P_TopMnt_Horizontal [mm]
  rrect25% 0.6x1.15 smd mask+0: A1(-3.2,3.68) A4(-2.4,3.68) A9(2.4,3.68) A12(3.2,3.68) B1(3.2,3.68) B4(2.4,3.68) B9(-2.4,3.68) B12(-3.2,3.68)
  rrect25% 0.3x1.15 smd mask+0: A5(-1.25,3.68) A6(-0.25,3.68) A7(0.25,3.68) A8(1.25,3.68) B5(1.75,3.68) B6(0.75,3.68) B7(-0.75,3.68) B8(-1.75,3.68)
  rrect100% 1x1.8 hole 1.4 slot 0.6 at 0 deg mask+0: S1(-4.32,-1.075) S1(4.32,-1.075)
  rrect100% 1x2.1 hole 1.7 slot 0.6 at 0 deg mask+0: S1(-4.32,3.105) S1(4.32,3.105)
  round 0.65 hole 0.65 paste-2539.97 mask+0: Un1(-2.89,2.605) Un2(2.89,2.605)
  silkscreen extent -4.67,0.1 4.67,1.8
USON-10_2.5x1.0mm_P0.5mm [mm]
  rrect25% 0.55x0.3 smd mask+0: 1(-0.385,1) 2(-0.385,0.5) 3(-0.385,0) 4(-0.385,-0.5) 5(-0.385,-1) 6(0.385,-1) 7(0.385,-0.5) 8(0.385,0) 9(0.385,0.5) 10(0.385,1)
  silkscreen extent -0.9,-1.41 0.5,1.69

## Part data
BT1: library part BatteryHolder_Keystone_3034_1x20mm, "Keystone 3034 SMD battery holder for 2020, 2025 and 2032 coincell batteries. http://www.keyelco.com/product-pdf.cfm?p=798", Footprint=CM5IO:BatteryHolder_Keystone_3034_1x20mm, Datasheet=https://www.keyelco.com/userAssets/file/M65p9.pdf, Field4=Digikey, Field5=36-3034-ND, Field6=3034, Field7=Keystone, Part Description="Battery Retainer Coin, 20.0mm 1 Cell SMD (SMT) Tab"
C1 C9 C10 C11 C12 C13 C18 C19: library part C_0402_1005Metric, "Capacitor SMD 0402 (1005 Metric), square (rectangular) end terminal, IPC_7351 nominal, (Body size source: IPC-SM-782 page 76, https://www.pcb-3d.com/wordpress/wp-content/uploads/ipc-sm-782a_amendment_1_and_2.pdf), generated with kicad-footprint-generator", Footprint=Capacitor_SMD:C_0402_1005Metric, ki_fp_filters=C_*
  C1 C9 C10 C12 C13 C18 C19: Datasheet=https://search.murata.co.jp/Ceramy/image/img/A01X/G101/ENG/GRM155R71C104KA88-01.pdf, Field4=Farnell, Field5=2611911, Field6="RM EMK105 B7104KV-F", Field7="TAIYO YUDEN EUROPE GMBH", Field8=110091611, Part Description="0.1uF 10% 16V Ceramic Capacitor X7R 0402 (1005 Metric)"
  C11: Part Description="4.7nF capacitor 0402"
C2 C4 C5 C6 C7 C8 C14 C15 C16 C17: library part C_0805_2012Metric, "Capacitor SMD 0805 (2012 Metric), square (rectangular) end terminal, IPC_7351 nominal, (Body size source: IPC-SM-782 page 76, https://www.pcb-3d.com/wordpress/wp-content/uploads/ipc-sm-782a_amendment_1_and_2.pdf, https://docs.google.com/spreadsheets/d/1BsfQQcO9C6DZCsRaXUlFlo91Tg2WpOkGARC1WS5S8t0/edit?usp=sharing), generated with kicad-footprint-generator", Footprint=Capacitor_SMD:C_0805_2012Metric, Datasheet=https://search.murata.co.jp/Ceramy/image/img/A01X/G101/ENG/GRM21BR71A106KA73-01.pdf, Field4=Digikey, Field5=490-14381-1-ND, Field6=GRM21BR71A106KA73L, Field7=Murata, Field8=111893011, Part Description="10uF 10% 10V Ceramic Capacitor X7R 0805 (2012 Metric)", ki_fp_filters=C_*
C3: library part CP_EIA-7343-31_Kemet-D, "Tantalum Capacitor SMD Kemet-D (7343-31 Metric), IPC_7351 nominal, (Body size from: http://www.kemet.com/Lists/ProductCatalog/Attachments/253/KEM_TC101_STD.pdf), generated with kicad-footprint-generator", Footprint=Capacitor_Tantalum_SMD:CP_EIA-7343-31_Kemet-D, Field4=Mouser, Field5=667-EEF-CX0J101R, Field7=Panasonic, Part Description="Capacitor, SP-Cap, 100u, 6.3V, 15mR ESR", ki_fp_filters=CP_*
D1 D2 D3: library part LED_0603_1608Metric, "LED SMD 0603 (1608 Metric), square (rectangular) end terminal, IPC_7351 nominal, (Body size source: http://www.tortai-tech.com/upload/download/2011102023233369053.pdf), generated with kicad-footprint-generator", Footprint=LED_SMD:LED_0603_1608Metric, Field4=Digikey, Field7=Rohm, ki_fp_filters="LED* LED_SMD:* LED_THT:*"
  D1: Datasheet=http://optoelectronics.liteon.com/upload/download/DS22-2000-210/LTST-S270KRKT.pdf, Field5=LTST-S270KRKT, Field6=SML-A12U8TT86Q, Field8=650295101, Part Description="Red 620nm LED Indication - Discrete 2.2V 2-SMD, No Lead"
  D2 D3: Datasheet=http://optoelectronics.liteon.com/upload/download/DS22-2000-226/LTST-S270KGKT.pdf, Field5=LTST-S270KGKT, Field6=SML-A12M8TT86N, Field8=650263301, Part Description="Green 572nm LED Indication - Discrete 2.2V 2-SMD, No Lead"
H1 H2 H3 H4 H5 H6 H7 H8: library part MountingHole_2.7mm_M2.5_DIN965, "Mounting Hole 2.7mm, no annular, M2.5, DIN965", Footprint=CM5IO:MountingHole_2.7mm_M2.5_DIN965, Field4=nf, Field5=nf, Field6=nf, Field7=nf, Part Description="M2.5 mounting hole", ki_fp_filters=MountingHole*
J2: library part PinHeader_2x07_P2.54mm_Vertical, "Through hole straight pin header, 2x07, 2.54mm pitch, double rows", Footprint=Connector_PinHeader_2.54mm:PinHeader_2x07_P2.54mm_Vertical, Datasheet=https://www.toby.co.uk/uploads/publications/1673.pdf, Field4=Toby, Field5=THD-07-R, Field6=THD-07-R, Field7=Toby, Part Description=PinHeader_2x07_P2.54mm_Vertical, ki_fp_filters=Connector*:*_2x??_*
J3: library part PinHeader_1x03_P2.54mm_Vertical, "Through hole straight pin header, 1x03, 2.54mm pitch, single row", Footprint=Connector_PinHeader_2.54mm:PinHeader_1x03_P2.54mm_Vertical, Field4=nf, Field5=nf, Field6=nf, Field7=nf, Part Description="3pin 0.1\" connector", ki_fp_filters=Connector*:*_1x??_*
J4: library part "M.2 M Key socket", Footprint="CM5IO:M.2 M Key socket", Description="M.2 Socket 3 Mechanical Key M", Field5=MTSSD03-67MSW337, Field6=MTSSD03-67MSW337, Field7=MTCONN, Part Description="M.2 M Key connector", ki_fp_filters=*M*2*M*
J5 J16: library part Hirose_FH12-22S-0.5SH_1x22-1MP_P0.50mm_Horizontal, "Molex FH12, FFC/FPC connector, FH12-22S-0.5SH, 22 Pins per row (https://www.hirose.com/product/en/products/FH12/FH12-24S-0.5SH(55)/), generated with kicad-footprint-generator", Footprint=CM5IO:Hirose_FH12-22S-0.5SH_1x22-1MP_P0.50mm_Horizontal, Datasheet=https://www.hirose.com/product/document?clcode=&productname=&series=FH12&documenttype=Catalog&lang=en&documentid=D31648_en, Field4=Mouser, Field5=798-FH12-22S-0.5SH55, Field6=FH12-22S-0.5SH55, Field7=Hirose, Part Description="22 Position FFC, FPC Connector Contacts, Bottom 0.020\" (0.50mm) Surface Mount, Right Angle", ki_fp_filters=Connector*:*_1x??_*
J6 J9: library part PinHeader_2x02_P2.54mm_Vertical, "Through hole straight pin header, 2x02, 2.54mm pitch, double rows", Footprint=Connector_PinHeader_2.54mm:PinHeader_2x02_P2.54mm_Vertical, Datasheet=https://www.toby.co.uk/uploads/publications/1673.pdf, Field4=Toby, Field5=THD-02-R, Field6=151-604-425-761, Field7=EDAC, Field8=UCON00791, Part Description=PinHeader_2x02_P2.54mm_Vertical, ki_fp_filters=Connector*:*_2x??_*
J7: library part SDCARD_MOLEX_503398-1892, Footprint=CM5IO:SDCARD_MOLEX_503398-1892, Datasheet=https://www.hirose.com/product/en/download_file/key_name/DM3/category/Catalog/doc_file_id/49662/?file_category_id=4&item_id=195&is_series=1, Field4=Farnell, Field5=2358234, Field6=503398-1892, Field7=Molex, Field8=UCON00512, Part Description="9 (8 + 1) Position Card Connector microSD™ Surface Mount, Right Angle Gold", ki_fp_filters=microSD*
J8: library part PinHeader_2x20_P2.54mm_Vertical, "Through hole straight pin header, 2x20, 2.54mm pitch, double rows", Footprint=Connector_PinHeader_2.54mm:PinHeader_2x20_P2.54mm_Vertical, Datasheet=https://www.toby.co.uk/uploads/publications/1673.pdf, Field4=Toby, Field5=THD-20-R, Field6=THD-20-R, Field7=Toby, Field8=UCON00511, Part Description=PinHeader_2x20_P2.54mm_Vertical, ki_fp_filters=Connector*:*_2x??_*
J10 J22: library part "EDAC 690-019-298-412", Footprint="CM5IO:EDAC 690-019-298-412", Datasheet=https://www.tme.eu/Document/f15dffbcfad8545e17826f72d36911c8/206A-SEAN-R03.pdf, Field4=Farnell, Field5=2614936, Field6=690-019-298-412, Field7=EDAC, Field8=UCON00802, Part Description="HDMI Connector, Right Angle, 19 Contacts, Receptacle, Surface Mount, Surface Mount Right Angle", ki_fp_filters=HDMI*A*
J11: library part USB_C_Receptacle_GCT_USB4105-xx-A_16P_TopMnt_Horizontal, "USB 2.0 Type C Receptacle, GCT, 16P, top mounted, horizontal, 5A: https://gct.co/files/drawings/usb4105.pdf", Footprint=Connector_USB:USB_C_Receptacle_GCT_USB4105-xx-A_16P_TopMnt_Horizontal, Datasheet=https://www.usb.org/sites/default/files/documents/usb_type-c.zip, Field5=USBF31-0171, Field6=USBF31-0171, Field7=MTCONN, Part Description="USBC USB2 data and power connector", ki_fp_filters=USB*C*Receptacle*
J12: library part MTCONN_UBAF30-D2011, "USB3 Stacked type A socket", Footprint=CM5IO:MTCONN_UBAF30-D2011, Field5=UBAF30-D2011, Field6=UBAF30-D2011, Field7=Mtconn, Part Description="Dual USB 3 connector"
J14: library part JST_SH_BM04B-SRSS-TB_1x04-1MP_P1.00mm_Vertical, "JST SH series connector, BM04B-SRSS-TB (http://www.jst-mfg.com/product/pdf/eng/eSH.pdf), generated with kicad-footprint-generator", Footprint=Connector_JST:JST_SH_BM04B-SRSS-TB_1x04-1MP_P1.00mm_Vertical, Field5=SHBM04B-SRSS-TB, Field6=SHBM04B-SRSS-TB, Field7=JST, Part Description="4 pin vertical 1mm pitch connector", ki_fp_filters=Connector*:*_1x??_*
L1: library part L_Bourns_SRP5030CC, "Inductor, Bourns, SRP5030T, 5.7mmx5.2mm (Script generated with StandardBox.py) (https://www.bourns.com/data/global/pdfs/SRP5030T.pdf)", Footprint=CM5IO:L_Bourns_SRP5030CC, Datasheet=https://www.bourns.com/docs/product-datasheets/srp5030cc.pdf, Field5=SRP5030CC-2R2M, Field6=SRP5030CC-2R2M, Field7=Bourns, Part Description="Inductor, SMT, 2520, 2u2, IRMS=7A, ISAT=8A, DCR=0.032R", ki_fp_filters="Choke_* *Coil* Inductor_* L_*"
logo1: library part KiCad-Logo2_5mm_SilkScreen, "KiCad Logo", Footprint=Symbol:KiCad-Logo2_5mm_SilkScreen
Module1: library part Raspberry-Pi-5-Compute-Module, "Raspberry Pi 5 Compute Module", Footprint=CM5IO:Raspberry-Pi-5-Compute-Module, Description="RaspberryPi Compute moduel 5", Field4=Amphenol, Field5="2x 10164227-1001A1RLF", Field6="2x 10164227-1001A1RLF", Field7=Hirose, Part Description="100 Position Connector Receptacle, Center Strip Contacts Surface Mount Gold"
R1 R2 R3 R6 R7 R8 R9 R10 R12 R14 R15 R16 R17: library part R_0402_1005Metric, "Resistor SMD 0402 (1005 Metric), square (rectangular) end terminal, IPC_7351 nominal, (Body size source: IPC-SM-782 page 72, https://www.pcb-3d.com/wordpress/wp-content/uploads/ipc-sm-782a_amendment_1_and_2.pdf), generated with kicad-footprint-generator", Footprint=Resistor_SMD:R_0402_1005Metric, Datasheet=https://fscdn.rohm.com/en/products/databook/datasheet/passive/resistor/chip_resistor/mcr-e.pdf, Field4=Farnell, ki_fp_filters=R_*
  R1 R10 R17: Field5=9239235, Field6=RK73H1ETTP1001F, Field7="KOA EUROPE GMBH", Field8=125049511, Part Description="Resistor 1K M1005 1% 63mW"
  R2 R3: Field5=9239197, Field6=RK73G1ETQTP4700D, Field7="KOA EUROPE GMBH", Field8=120887981, Part Description="Resistor 470R M1005 1% 63mW"
  R6 R7 R8 R9 R16: Part Description="Resistor 2.2K M1005 1% 63mW"
  R12: Field5=9239375, Field6=MCR01MZPF1502, Field7=Rohm, Field8=120891581, Part Description="Resistor 15K M1005 1% 63mW"
  R14: Field6=MCR01MZPF1003, Field7=Rohm, Part Description="Resistor 100K M1005 1% 63mW"
  R15: Field6=MCR01MZPF1002, Field7=Rohm, Part Description="Resistor 10K M1005 1% 63mW"
R4 R5: library part R_0805_2012Metric_Pad1.20x1.40mm_HandSolder, "Resistor SMD 0805 (2012 Metric), square (rectangular) end terminal, IPC_7351 nominal with elongated pad for handsoldering. (Body size source: IPC-SM-782 page 72, https://www.pcb-3d.com/wordpress/wp-content/uploads/ipc-sm-782a_amendment_1_and_2.pdf), generated with kicad-footprint-generator", Footprint=Resistor_SMD:R_0805_2012Metric_Pad1.20x1.40mm_HandSolder, Datasheet=https://fscdn.rohm.com/en/products/databook/datasheet/passive/resistor/chip_resistor/mcr-e.pdf, ki_fp_filters=R_*
  R4: Field4=nf, Field5=nf, Field6=nf
  R5: Field4=Farnell, Field5=9233750, Field6=MCR10EZPJ000, Field7=Rohm, Field8=121629591, Part Description="Resistor 0R M2012 5%"
SW1: library part SW_Tactile_SPST_Angled_PTS645Vx58-2LFS, "tactile switch SPST right angle, PTS645VL58-2 LFS", Footprint=Button_Switch_THT:SW_Tactile_SPST_Angled_PTS645Vx58-2LFS, Datasheet=https://www.mouser.co.uk/datasheet/2/240/Littelfuse-3050591.pdf, Description="Push button switch, generic, two pins", Field5=PTS645VH58-2LFS, Field6=PTS645VH58-2LFS, Field7=CK, Part Description="Right angle through hole Tact switch"
TP1 TP3 TP5: library part TestPoint_Pad_2.0x2.0mm, "SMD rectangular pad as test Point, square 2.0mm side length", Footprint=TestPoint:TestPoint_Pad_2.0x2.0mm, Field4=nf, Field5=nf, Field6=nf, Field7=nf, Part Description="Test point", ki_fp_filters="Pin* Test*"
U1 U2: library part USON-10_2.5x1.0mm_P0.5mm, "USON-10 2.5x1.0mm_ Pitch 0.5mm http://www.ti.com/lit/ds/symlink/tpd4e02b04.pdf", Footprint=Package_SON:USON-10_2.5x1.0mm_P0.5mm, Datasheet=http://www.ti.com/lit/ds/symlink/tpd2eusb30a.pdf, Field4=Farnell, Field5=2335455, Field6=CDDFN10-3324P-13, Field7=Bourns, Field8=UDIO00346, Part Description="Quad TVS diode for high speed signals (USB3, GigE etc.)", ki_fp_filters=USON*2.5x1.0mm*P0.5mm*
U3: library part TRJG0926HENL, "https://p.globalsources.com/IMAGES/PDT/SPEC/690/K1160305690.pdf", Footprint=CM5IO:TRJG0926HENL, Datasheet=https://p.globalsources.com/IMAGES/PDT/SPEC/690/K1160305690.pdf, Field5=TRJG0926HENL, Field6=TRJG0926HENL, Field7=Trxcon, Field8=UCON00900, Part Description="Gigabit Ethernet Magjack"
U5: library part SOT-353_SC-70-5, "SOT-353, SC-70-5", Footprint=Package_TO_SOT_SMD:SOT-353_SC-70-5, Datasheet=https://www.diodes.com/assets/Datasheets/74LVC1G07.pdf, Field4=Farnell, Field5=2425492, Field6=74LVC1G07SE-7, Field7=Diodes, Part Description="Buffer, Non-Inverting 1 Element 1 Bit per Element Open Drain Output SOT-353", ki_fp_filters="SOT* SG-*"
U6: library part SOT-23-6, "SOT, 6 Pin (~), generated with kicad-footprint-generator ipc_gullwing_generator.py", Footprint=Package_TO_SOT_SMD:SOT-23-6, Datasheet=https://www.diodes.com/assets/Datasheets/AP255x.pdf, Field4=Digikey, Field5=31-AP22653W6-7CT-ND, Field6=AP22653W6, Field7=Diodes, Part Description="Power Switch/Driver 1:1 P-Channel 2.1A SOT-23-6"
U7: library part Crystal_SMD_3225-4Pin_3.2x2.5mm, "SMD Crystal SERIES SMD3225/4 http://www.txccrystal.com/images/pdf/7m-accuracy.pdf, 3.2x2.5mm^2 package", Footprint=Crystal:Crystal_SMD_3225-4Pin_3.2x2.5mm, Datasheet=https://abracon.com/Oscillators/ASEK.pdf, Field5=ASEK-32.768KHZ-L-R-T, Field6=ASEK-32.768KHZ-L-R-T, Field7=abracon, Part Description="32KHz Xtal oscilator"
U8: library part DFN-8-1EP_2x2mm_P0.5mm_EP1.05x1.75mm, "DFN8 2x2, 0.5P; CASE 506CN (see ON Semiconductor 506CN.PDF)", Footprint=Package_DFN_QFN:DFN-8-1EP_2x2mm_P0.5mm_EP1.05x1.75mm, Datasheet=https://www.diodes.com/assets/Datasheets/AP3441-L.pdf, Field5=AP3441SHE-7B, Field6=AP3441SHE-7B, Field7=Diodes, Part Description="3A DC-DC converter"
U12: library part TSOT-23_HandSoldering, "5-pin TSOT23 package, http://cds.linear.com/docs/en/packaging/SOT_5_05-08-1635.pdf", Footprint=Package_TO_SOT_SMD:TSOT-23_HandSoldering, Datasheet=https://www.richtek.com/assets/product_file/RT9742/DS9742-10.pdf, Field4=Farnell, Field5=2575555, Field6=RT9742SNGV, Field7=RichTek, Field8=USWI00155, Part Description="Power Switch/Driver 1:1 N-Channel 500mA SOT-23-3"
U18: library part SOT-23-5, "SOT, 5 Pin (~), generated with kicad-footprint-generator ipc_gullwing_generator.py", Footprint=Package_TO_SOT_SMD:SOT-23-5, Datasheet=https://www.richtek.com/assets/product_file/RT9742/DS9742-00.pdf, Field4=Farnell, Field5=2545875, Field6=RT9742GGJ5, Field7=RichTek, Field8=USWI00166, Part Description="Power Switch/Driver 1:1 N-Channel 1A TSOT-23-5"

## Via types
v1: diameter 0.45, hole 0.2, F.Cu to B.Cu, tented both sides, 703 vias

## Nets (pads, with @x,y where several pads share a name; then routed paths per layer and width w, separated by ;. In a path a pad name is that pad's centre, name@x,y a point inside that pad or via, vN(x,y) a via of type N, cw(c..) or ccw(c..) an arc to the next point about the centre after c; other vN are vias at no path point)
+1.8v: Module1.88 Module1.90 R4.1 | length 12.6
  F.Cu w0.2: Module1.88@-13.08,-7.9 -12.5,-7.9 -12.2,-7.6 -12.2,-7.5 ; Module1.90@-13.08,-7.5 -12.2,-7.5 ; R4.1@-12.525,0.7 -13.5,0.7 -14.1,0.1 -14.1,-2.3 -12.9,-3.5 -12.7,-3.5 -11.9,-4.3 -11.9,-7.2 -12.2,-7.5
+3.3v: D1.2 D2.2 J5.22 J8.1 J8.17 J16.22 Module1.84 Module1.86 R5.1 R8.1 U3.15 U3.17 U5.5 U18.5 | length 324.6
  F.Cu w0.127: -70.55,-74.05 -63.5,-74.1
  F.Cu w0.13: D1.2@-95.587,-79.2 -95.587,-75.887 -93.4,-73.7 v1(-91.5,-73.7) ; D2.2@-91.937,-79.162 -92.6,-78.5 -92.6,-76 U5.5@-91.393,-74.793
  F.Cu w0.2: J16.22@-75.75,2.85 v1(-75.2,2.85) -75.15,2.85 -74.77,2.47 R8.1@-74.77,0 ; v1@-14.4,-8.6 -14.4,-8.5 -14.2,-8.3 -13.08,-8.3 -12.4,-8.3 -12.2,-8.5 -12.4,-8.7 -13.08,-8.7 -14.3,-8.7 v1@-14.4,-8.6
  F.Cu w0.23: R5.1@-12.525,-1.8 -11.5,-2.825 -11.5,-7.7 -12.25,-8.45 v1(-12.25,-8.5)
  F.Cu w0.3: J5.22@-111.75,2.85 v1(-111.35,2.85) ; -63.5,-74.1 -61.89,-74.1 U3.15@-61.13,-74.86
  F.Cu w0.5: U5.5@-91.25,-74.55 -91.25,-74.105 ; v1(-2.6,-14.6) U18.5@-1.7,-14.6
  F.Cu w1: v1(-91.5,-73.7) -90.9,-73.7 -90.55,-74.05 -70.55,-74.05 ; U3.15@-61.13,-74.86 -59.39,-76.6 -57.5,-76.6 -55.76,-74.86 U3.17@-50.41,-74.86 ; v1(-22.7,-4.9) -22.5,-4.9 -19.1,-8.3 -14.6,-8.3 v1@-14.4,-8.5
  B.Cu w0.5: -121.5,-27.75 -120.13,-29.12 -118.9,-27.89 -118.9,-25.7 -120.3,-24.3 -121.5,-25.5 -121.5,-27.75
  B.Cu w1: v1@-14.4,-8.5 -11.5,-8.5 -5.4,-14.6 v1(-2.6,-14.6)
  B.Cu w1.5: -47.9,2.8 -47.1,2 -42.6,2 -41.3,3.3
  B.Cu w2: -120.3,-24.3 -120.3,-8.4 -124.3,-4.4 -124.3,1.9 -122.905,3.295 -105.632,3.295 -103.637,1.3 -94.4,1.3 -92.3,3.4 -75.75,3.4 v1(-75.2,2.85) -74.95,2.6 -48.1,2.6 ; J8.1@-120.13,-29.12 -120.13,-30.87 -120,-31 -119.1,-31.9 ; J8.17@-99.81,-29.12 -99.81,-30.21 -101.5,-31.9 -119.1,-31.9 ; v1(-91.5,-73.7) -93.4,-73.7 -94.9,-72.2 -94.9,-69.6 -99,-65.5 -99,-52 -119.1,-31.9 ; -41.2,3.3 -33.7,3.3 -32.4,2 -29.6,2 v1(-22.7,-4.9)
  other v1: -14.45,-8.5 -21.9,-5.5
+5v: C2.1 C4.1 C6.1 C9.1 C10.1 C12.1 C18.1 J8.2 J8.4 J11.A4 J11.A9 J11.B4 J11.B9 J14.1 Module1.77 Module1.79 Module1.81 Module1.83 Module1.85 Module1.87 R9.1 U6.1 U8.3 U12.1 | length 284.2
  F.Cu w0.13: C12.1@-96.215,-70.285 -96.8,-69.7 -96.8,-65.7 v1(-96.1,-65)
  F.Cu w0.2: Module1.77@-10,-9.9 -6.5,-9.9 v1(-6.1,-9.5) ; Module1.79@-10,-9.5 -6.9,-9.5 v1(-6.1,-9.5) ; Module1.81@-10,-9.1 -8,-9.1 -7.6,-9.5 ; Module1.83@-10,-8.7 -7.9,-8.7 v1@-7.1,-9.5 ; Module1.85@-10,-8.3 -7.7,-8.3 -6.5,-9.5 ; Module1.87@-10,-7.9 -7.7,-7.9 v1(-6.1,-9.5)
  F.Cu w0.23: J8.4@-117.59,-26.63 -116.42,-27.8 -114.3,-27.8 -113.8,-28.3 -113.8,-30 -113.1,-30.7 -111.6,-30.7 v1(-108.3,-34) ; C12.1@-96.215,-70.285 -95.95,-70.285 -95.025,-70.285 U12.1@-94.35,-69.61 ; v1(-6.15,-8.5) -6.15,-6.25 -4.4,-4.5 J14.1@-0.875,-4.5 ; C4.1@0.6,-60.3 1.35,-59.55 U8.3@1.35,-58.2
  F.Cu w0.3: R9.1@-1.2,-63.29 -1.2,-62.3
  F.Cu w0.5: v1(-23.3,-72.6) -22.9,-73 ; C9.1@-22.8,-71.4 -22.8,-72 v1(-22.9,-72.1) -22.9,-73 ; v1(-22.4,-72.6) -22.9,-73.1 J11.B9@-22.9,-74.145 -22.9,-73 ; U6.1@-19.05,-52.425 -19.05,-50.925 C2.1@-18.125,-50 ; v1(-18.3,-72.7) -18.3,-73.37 -18.1,-73.57 J11.B4@-18.1,-74.145 -18.1,-73.3 ; C18.1@-17.76,-71.4 -17.76,-72.16 v1(-17.8,-72.2) -17.8,-73 -18.1,-73.3 ; v1(-17.6,-72.8) -18.1,-73.3 ; C10.1@-1,-59.9 0.2,-59.9 C4.1@0.6,-60.3
  F.Cu w1: C2.1@-18.125,-50 -18,-50.125 v1(-18,-51.2) ; -4.7,-55.2 -4.7,-60.4 -2.8,-62.3 -1.2,-62.3 C6.1@0.6,-62.3 C4.1@0.6,-60.3
  F.Cu w2: J8.2@-120.13,-26.58 -120.13,-23.83 -118.1,-21.8 -117.59,-22.31 J8.4@-117.59,-26.58
  F.Cu w3: -118.1,-21.8 -106.9,-21.8 -90.259,-5.159 -66.359,-5.159 -63.3,-2.1 -17.9,-2.1 v1@-17.3,-2.7
  B.Cu w0.23: v1(-108.3,-34) -96.1,-46.2 v1(-96.1,-65)
  B.Cu w0.5: v1(-23.3,-72.6) v1(-22.4,-72.6) ; v1(-17.8,-72.2) -17.6,-72.4 v1(-17.6,-72.8)
  B.Cu w1: v1(-18,-51.2) -17.8,-51.4 v1(-17.8,-72.2)
  B.Cu w2: v1(-22.4,-72.6) -22.3,-72.7 v1(-18.3,-72.7)
  B.Cu w3: v1@-17.3,-2.7 -7.5,-2.7 -7,-3.2 v1(-7,-9.6)
  other v1: -4.2,-55.4 -4.9,-55 -3.6,-55 -4.2,-54.7 -4.2,-53.1 -4.2,-51.1 -6.65,-10.3 -6.95,-8.7 -17.35,-3.8 -16.45,-3.2 -17.35,-2.7 -16.45,-2 -17.35,-1.6
BT_nDis: J3.3 Module1.91 | length 16.9
  F.Cu w0.13: Module1.91@-10,-7.1 -9.1,-7.1 -5.08,-3.08 J3.3@-5.08,7.2
CAM_GPIO0: J5.17 Module1.97 | length 117.8
  F.Cu w0.13: J5.17@-114.25,2.85 -114.25,5.05 -111.3,8 -103.9,8 -103,8.9 -94.3,8.9 -93.4,8 -72.6,8 -71.2,6.6 -71.2,3.9 -68.2,0.9 -34.7,0.9 -34.4,1.2 -30.6,1.2 -29.72,0.32 v1(-22.8,0.32) ; Module1.97@-10,-5.9 -9.5,-5.9 -9.3,-5.7 -9.3,-5 v1(-9.5,-4.8)
  B.Cu w0.13: v1(-22.8,0.32) -17.88,-4.6 -9.7,-4.6 v1(-9.5,-4.8)
CAM_GPIO1: J5.18 Module1.100 | length 113.1
  F.Cu w0.13: J5.18@-113.75,2.85 -113.75,4.95 -111.034,7.666 -103.634,7.666 -102.8,8.5 -94.434,8.5 -93.6,7.666 -72.834,7.666 -71.5,6.332 -71.5,3.7 -68.3,0.5 -34.3,0.5 -34,0.8 -30.7,0.8 -29.8,-0.1 -17,-0.1 -15.2,-1.9 -15.2,-4 -13.7,-5.5 Module1.100@-13.08,-5.5
CC1: J11.A5 Module1.94 | length 80.3
  F.Cu w0.127: J11.A5@-21.75,-74.145 -21.75,-71.15 -15.625,-65.025 v1(-15.625,-53.5) ; v1(-14.7,-6.9) -14.5,-6.7 ; v1(-13.7,-51.6) -8.7,-46.6 -8.7,-26.144 -8,-25.444 -8,-19.7 v1(-8.2,-19.5)
  F.Cu w0.13: -14.5,-6.7 Module1.94@-13.08,-6.7
  B.Cu w0.127: v1(-15.625,-53.5) -13.725,-51.6 v1(-13.7,-51.6) ; v1(-14.7,-6.9) -15.093,-7.293 -15.093,-8.906 -14.6,-9.4 -11.7,-9.4 -7.2,-13.9 -7.2,-18.5 v1(-8.2,-19.5)
CC2: J11.B5 Module1.96 | length 79.2
  F.Cu w0.13: J11.B5@-18.75,-74.145 -18.75,-70.55 -8.5,-60.3 -8.5,-56.5 -8.3,-56.3 -8.3,-26.4 -7.6,-25.7 -7.6,-17.8 v1(-7.7,-17.7) ; v1(-15.5,-6.9) -14.9,-6.3 Module1.96@-13.08,-6.3
  B.Cu w0.13: v1(-15.5,-6.9) -15.5,-9 -12.8,-11.7 -10.4,-11.7 -7.68,-14.42 -7.68,-17.68 v1(-7.7,-17.7)
DPHY0_C_N: J5.8 Module1.127 | length 92.4
  F.Cu w0.127: v1(-118.85,1.1) -118.69,1.26 -118.69,1.815 -118.75,1.875 J5.8@-118.75,2.85 ; Module1.127@-43.92,-19.9 -43.395,-19.9 -43.385,-19.89 -42.046,-19.89 v1(-41.885,-20.051)
  B.Cu w0.127: v1(-118.85,1.1) -118.69,0.94 -118.69,0.421 -118.379,0.11 -115.279,0.11 -106.279,-8.89 -53.679,-8.89 -51.179,-11.39 -47.679,-11.39 -46.579,-12.49 -45.579,-12.49 -42.79,-15.279 -42.79,-19.379 -42.279,-19.89 -42.046,-19.89 v1(-41.885,-20.051)
DPHY0_C_P: J5.9 Module1.129 | length 94.1
  F.Cu w0.127: J5.9@-118.25,2.85 -118.25,1.875 -118.31,1.815 -118.31,1.26 v1(-118.15,1.1) ; Module1.129@-43.92,-19.5 -43.395,-19.5 -43.385,-19.51 -42.046,-19.51 v1(-41.885,-19.348)
  B.Cu w0.127: v1(-118.15,1.1) -118.31,0.94 -118.31,0.579 -118.221,0.49 -115.121,0.49 -111.214,-3.417 -111.18,-3.451 ccw(c-110.985,-3.256) -110.79,-3.451 ccw(c-110.595,-3.646) -110.4,-3.451 -110.366,-3.486 ccw(c-110.561,-3.681) -110.366,-3.876 ccw(c-110.171,-4.071) -110.366,-4.266 -106.121,-8.51 -53.521,-8.51 -51.021,-11.01 -47.521,-11.01 -46.421,-12.11 -45.421,-12.11 -42.41,-15.121 -42.41,-19.221 -42.121,-19.51 -42.046,-19.51 v1(-41.885,-19.348)
DPHY0_D0_N: J5.2 Module1.115 | length 96.9
  F.Cu w0.127: v1(-121.85,1.2) -121.69,1.36 -121.69,1.815 -121.75,1.875 J5.2@-121.75,2.85 ; Module1.115@-43.92,-22.3 -43.395,-22.3 -43.385,-22.29 -42.06,-22.29 v1(-41.9,-22.45)
  B.Cu w0.127: v1(-121.85,1.2) -121.69,1.04 -121.69,-4.579 -113.679,-12.59 -58.379,-12.59 -49.779,-21.19 -46.482,-21.19 -46.473,-21.181 -46.127,-21.181 -46.118,-21.19 -44.779,-21.19 -43.679,-22.29 -42.06,-22.29 v1(-41.9,-22.45)
DPHY0_D0_P: J5.3 Module1.117 | length 98.7
  F.Cu w0.127: J5.3@-121.25,2.85 -121.25,1.875 -121.31,1.815 -121.31,1.36 v1(-121.15,1.2) ; Module1.117@-43.92,-21.9 -43.395,-21.9 -43.385,-21.91 -42.01,-21.91 v1(-41.9,-21.8)